# Altium PCB 0JCXG0_adapter_board.pcbdoc
Units mil, origin at the board's own origin, x right, y up, seen from the top; angles counter-clockwise.
Board outline 3937.05 x 985.09 mil, 2 copper layers (Top Layer, Bottom Layer); 11 components, 16 nets, 42 pads, 18 vias.
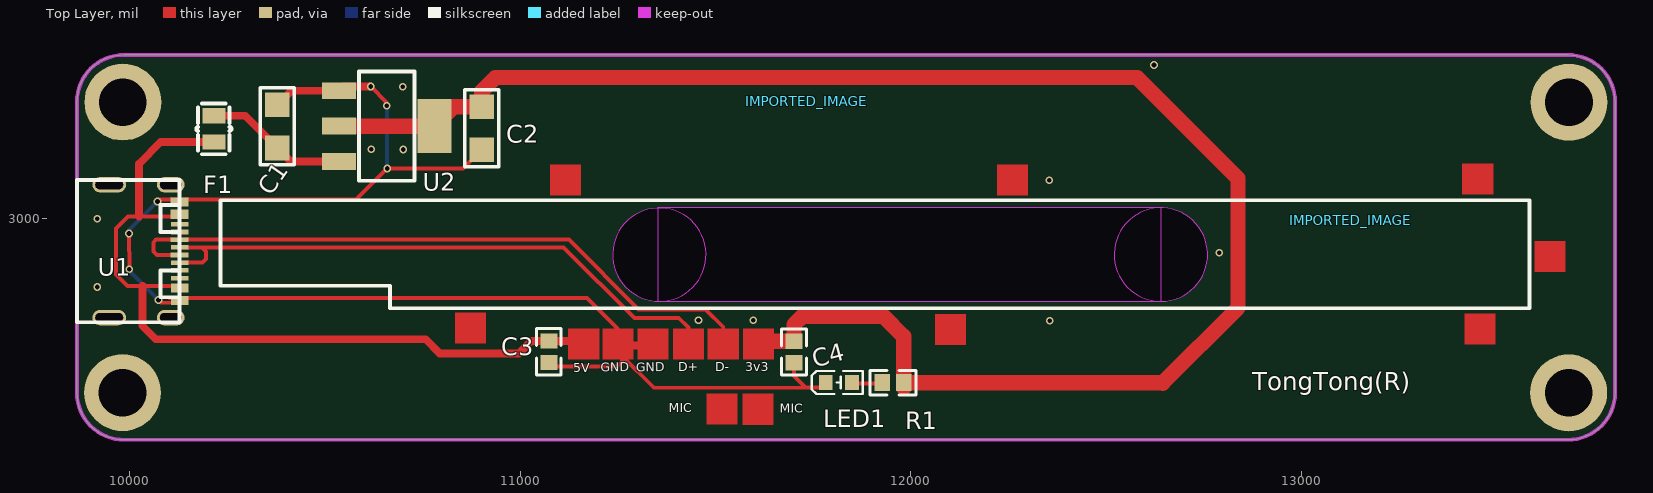
[diagram p0: Top Layer view]
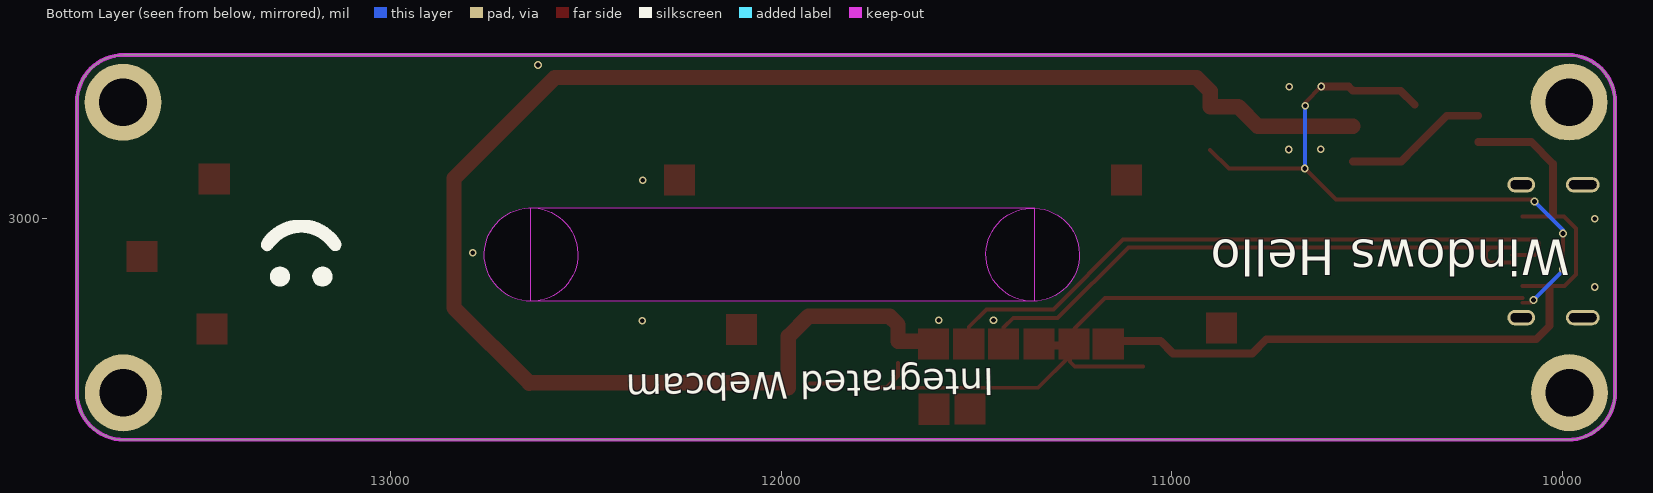
[diagram p1: Bottom Layer view, seen from below]

## Layer stack, top to bottom
Top Solder: solder mask 0.4, Solder Resist, Dk 3.5
Top Layer: signal copper 1.4
Dielectric1: dielectric 12.6, FR-4, Dk 4.8
Bottom Layer: signal copper 1.4
Bottom Solder: solder mask 0.4, Solder Resist, Dk 3.5

## Board outline
9865.73,2553.61 9865.73,3297.64 cw(c9986.23,3297.64) 9986.23,3418.14 9986.23,3418.11 13682.26,3418.11 cw(c13682.26,3297.61) 13802.75,3297.62 13802.73,3297.61 13802.73,2553.55 cw(c13682.23,2553.55) 13682.24,2433.05 13682.23,2433.11 9986.23,2433.11 9986.2,2433.07 cw(c9986.2,2553.57)
cut-out: 9986.23,3418.11
cut-out: 11356.67,2787.13 ccw(c11356.62,2906.7) 11356.57,2787.13 11356.67,2787.13
cut-out: 11351.95,3026.38 11351.95,2787.01 12641.32,2787.01 12641.32,3026.38
cut-out: 12640.33,2787.53 ccw(c12640.27,2907.1) 12640.22,2787.53 12640.33,2787.53

## Design rules (kind name [scope] priority, off if disabled: settings)
Clearance [All] p1: gap=10 ignorepadtopadclearanceinfootprint=FALSE except(0: Arc-Hole Track-Hole SMDPad-Hole THPad-Hole Via-Hole Fill-Hole Poly-Hole Region-Hole Text-Hole)
PolygonConnect [All] p1: connectstyle=Relief reliefconductorwidth=10 reliefentries=4 polygonreliefangle="90 Angle" airgapwidth=10
RoutingVias [All] p1: holewidth=28 width=50 viastyle="Through Hole" minholewidth=28 minwidth=50 maxholewidth=28 maxwidth=50
SolderMaskExpansion [All] p1: expansion=4
Width [All] p1: maxlimit=10 minlimit=10 preferedwidth=10
30 further rules are at their usual default settings.

## Components (designator, comment, footprint, x,y, rotation, side; value= is the part's Value field where it differs from the comment)
C1 "47uf" C1206#1 10378.72,3290.16 r270 top
C2 "47uf" C1206#2 10902.34,3175.2 r90 top
C3 "47uf" 0603 11073.6,2658.27 r270 top
C4 "47uf" 0603 11701.16,2657.48 r270 top
F1 "JK-SMD0805-050" FUSE_0805 10216.12,3228.74 r90 top
IMPORTED_IMAGE "Comment" IMPORTED_IMAGE 13126.35,2995.26 r0 top
IMPORTED_IMAGE "Comment" IMPORTED_IMAGE 11733.44,3299.19 r0 top
LED1 "LED0603-FD" LED0603-FD 11815.73,2579.53 r180 top
R1 "1K" 0603 11954.31,2579.14 r180 top
U1 "USB-TYPE-S-C8.64X7.25" USB-TYPE-S-C8.64X7.25 9948.41,2745.67 r0 top
U2 "SOT-223_L6.7-W3.5-P2.30-BR" SOT-223_L6.7-W3.5-P2.30-BR 10658.64,3235.83 r180 top

## Footprints (in the part's own frame and the unit in brackets; to place one, negate y for a bottom-side part, rotate by r counter-clockwise, add the part's x,y. Pads: shape width x height; smd on the part's side, far side on the other; paste and mask are expansions set on the pad)
0603 [mm]
  rect 1x1.1 smd: 1(-0.7,0) 2(0.7,0)
  silkscreen extent -1.5,-0.8 1.5,0.8
C1206#1 [mil]
  rect 63.01x63 smd: 1(0,0.01)
  rect 63x63 smd: 2(110.2,0.01)
  silkscreen extent -43,-43 154,43
C1206#2 [mil]
  rect 63x63 smd: 1(0,0.01) 2(110.2,0.01)
  silkscreen extent -43,-43 154,43
FUSE_0805 [mm]
  rect 1x1.5 smd: 1(-0.85,0) 2(0.85,0)
  silkscreen extent -1.65,-1.14 1.65,1.14
IMPORTED_IMAGE [mil]
LED0603-FD [mil]
  rect 35.44x39.38 smd: 1(-33.48,-0.06)
  rect 35.43x39.38 smd: 2(33.45,-0.06)
  silkscreen extent -61,-30 69,30
SOT-223_L6.7-W3.5-P2.30-BR [mm]
  rect 2.2x1.1 smd: 1(3.099,-2.3) 2(3.099,0) 3(3.099,2.3)
  rect 2.2x3.5 smd: 4(-3.099,0)
  silkscreen extent -1.8,-3.55 1.8,3.55
USB-TYPE-S-C8.64X7.25 [mm]
  oval 2.199x1 hole 0.6 slot 1.8 at 0 deg: 0(0,0)
  oval 2.199x1 hole 0.6 slot 1.8 at 0 deg copper offset 0,0: 0(0,8.64)
  oval 1.799x1 hole 0.6 slot 1.4 at 0 deg: 0(4,0)
  oval 1.799x1 hole 0.6 slot 1.4 at 0 deg copper offset 0,0: 0(4,8.64)
  rect 1.151x0.3 smd: A1(4.575,7.67) A4(4.575,6.87) B7(4.575,5.069) B9(4.575,6.57) B12(4.575,7.371)
  rect 1.148x0.3 smd: A5(4.576,5.57) A6(4.576,4.569) A8(4.576,3.07) A9(4.576,1.77) A12(4.576,0.97) B1(4.576,1.269) B4(4.576,2.07) B5(4.576,2.57) B6(4.576,3.571) B8(4.576,6.07)
  rect 1.151x0.302 smd: A7(4.575,4.07)
  silkscreen extent -2.1,-0.3 4.58,8.94

## Free pads (board coordinates)
  round 196.85 hole 122.05: 33(9982.65,2553.56) 33(9983.43,3297.27) 33(13683.82,2553.17) 33(13684.61,3296.88)

## Via types
v1: diameter 19.69, hole 12.01, Top Layer to Bottom Layer, 18 vias

## Nets (pads, with @x,y where several pads share a name; then routed paths per layer and width w, separated by ;. In a path a pad name is that pad's centre, name@x,y a point inside that pad or via, vN(x,y) a via of type N, cw(c..) or ccw(c..) an arc to the next point about the centre after c; other vN are vias at no path point)
0: 
3V3: C2.2 C4.1 R1.1 U2.2 U2.4 | length 4334.6
  Top Layer w39.37: U2.2 U2.4 10830.21,3285.4 C2.2 10902.33,3325.61 10936.93,3360.21 12553.93,3360.21 12579.23,3360.21 12837.43,3102.01 12837.43,2770.51 12644.83,2577.91 12643.73,2579.11 R1.1@11981.83,2579.11 ; 11606.67,2696.06 11617.69,2685.05 C4.1 ; C4.1@11701.13,2685.01 11701.13,2727.91 11722.43,2749.21 11930.33,2749.21 11981.83,2697.71 R1.1@11981.83,2566.11
5V: C1.2 C3.1 F1.1 F1.2 U1.A4 U1.A9 U1.B4 U1.B9 U2.3 | length 2412.1
  Top Layer w10: 10102.93,3004.31 9996.43,3004.31 9966.13,2974.01 9966.13,2856.31 9995.23,2827.11 10103.03,2827.11
  Top Layer w19.68: 10024.83,3004.31 10024.83,3139.81 10080.33,3195.31 F1.1 ; 10033.43,2827.11 10033.43,2724.51 10067.33,2690.51 10758.63,2690.51 ; F1.2 10296.48,3262.2 C1.2 10413.41,3145.27 U2.3 ; 10758.63,2690.11 10794.83,2653.91 10997.23,2653.91 11029.13,2685.81 C3.1 ; C3.1 11156.29,2685.84 11162.97,2692.52
DATA+: U1.A6 U1.B6 | length 1560.7
  Top Layer w10: U1.B6@10127.93,2886.3 10186.76,2886.3 10195.79,2895.32 10195.79,2915.01 10185.21,2925.59 U1.A6@10127.93,2925.59 ; 10160.33,2925.51 11111.43,2925.51 11292.53,2744.51 11406.23,2744.51 11430.73,2720.11 11430.73,2678.31
DATA-: U1.A7 U1.B7 | length 1715
  Top Layer w10: 10102.93,2945.21 11125.23,2945.21 11303.53,2766.91 11474.83,2766.91 11520.03,2721.61 11520.03,2678.31 ; U1.A7@10127.86,2905.99 10070.96,2905.99 10061.96,2914.99 10061.96,2938.59 10068.56,2945.29 U1.B7@10127.86,2945.29
GND: C1.1 C2.1 C3.2 C4.2 LED1.2 U1.A1 U1.A12 U1.B1 U1.B12 U2.1 | length 3906.8
  Top Layer w10: v1(9999.19,2961.02) v1(9999.98,2869.69) ; v1(10072.03,3042.91) 10076.77,3047.65 10102.94,3047.65 10580.3,3047.65 v1(10659.82,3127.17) 10854.31,3127.17 C2.1 ; v1(10074.39,2790.55) 10081.09,2783.85 10102.99,2783.85 ; 10103.03,2795.61 11170.83,2795.61 11249.23,2717.31 11249.23,2694.11 11250.73,2692.51 ; v1(10618.09,3337.01) 10658.64,3296.46 v1(10658.64,3287.8) ; C3.2@11073.6,2620.08 11248.81,2620.08 11261.4,2632.67 11261.4,2671.25 11250.77,2681.88 ; 11261.4,2647.64 11342.79,2566.25 11751.55,2566.25 ; C4.2 11701.16,2596.06 11730.69,2566.53 LED1.2@11782.26,2566.53
  Top Layer w19.68: C1.1 10414.94,3326.38 U2.1 10547.27,3337.01 v1(10618.09,3337.01) ; 11250.96,2674.41 11340.33,2674.41
  Bottom Layer w10: v1(9999.19,2961.02) 9999.19,2970.07 v1(10072.03,3042.91) ; v1(9999.98,2869.69) 9999.98,2864.96 v1(10074.39,2790.55) ; v1(10658.64,3287.8) 10659.82,3286.62 v1(10659.82,3127.17)
  other v1: 12355.49,2737.8 11456.67,2738.98 11596.83,2738.98 9917.69,2824.02 12789.74,2911.42 9917.69,2998.82 12354.31,3097.64 10619.27,3176.38 10701.16,3175.99 10699.98,3336.62 12622.42,3392.13
MIC: 
S$67: 
S$69: 
S$179: 
S$181: 
S$185: 
S$225: 
S$230: 
S$24065: 
S$85385: LED1.1 R1.2 | length 77.7
  Top Layer w10: LED1.1@11848.8,2577.56 11925.98,2577.56 R1.2@11926.36,2577.17
pads on no net: U1.0 U1.A5 U1.A8 U1.B5 U1.B8

## Polygon pours and split planes (outlines as drawn)
no net on Bottom Solder (none): 9865.73,2553.61 9865.73,3297.64 cw(c9986.23,3297.64) 9986.23,3418.14 9986.23,3418.11 13682.26,3418.11 cw(c13682.26,3297.61) 13802.75,3297.62 13802.73,3297.61 13802.73,2553.55 cw(c13682.23,2553.55) 13682.24,2433.05 13682.23,2433.11 9986.23,2433.11 9986.2,2433.07 cw(c9986.2,2553.57)

## Keep-outs
Keep-Out Layer:
  lines w10: 9865.71,2553.57 ccw(c9986.2,2553.57) 9986.2,2433.07 ; 9865.73,3297.64 cw(c9986.23,3297.64) 9986.23,3418.14 ; 13682.24,2433.05 ccw(c13682.23,2553.55) 13802.73,2553.55 ; 13682.26,3418.11 cw(c13682.26,3297.61) 13802.75,3297.62

## Other copper
Top Layer:
  region net 0: 11077.34,3137.2 11077.34,3058.85 11155.69,3058.85 11155.69,3137.2
  region net 0: 10834.04,2758.06 10834.04,2679.72 10912.38,2679.72 10912.38,2758.06
  region net 0: 13411.98,3139.17 13411.98,3060.82 13490.33,3060.82 13490.33,3139.17
  region net 0: 13597.41,2941.14 13597.41,2862.79 13675.76,2862.79 13675.76,2941.14
  region net 0: 13417.89,2755.7 13417.89,2677.36 13496.24,2677.36 13496.24,2755.7
  region net 0: 12221.43,3137.2 12221.43,3058.86 12299.78,3058.86 12299.78,3137.2
  region net 0: 12062.77,2754.53 12062.77,2676.18 12141.12,2676.18 12141.12,2754.53
  region net 5V: 11123.79,2717.52 11123.79,2639.17 11202.14,2639.17 11202.14,2717.52
  region net GND: 11300.95,2717.52 11300.95,2639.17 11379.3,2639.17 11379.3,2717.52
  region net DATA+: 11391.5,2717.52 11391.5,2639.17 11469.85,2639.17 11469.85,2717.52
  region net DATA-: 11480.88,2717.52 11480.88,2639.17 11559.22,2639.17 11559.22,2717.52
  region net 3V3: 11571.03,2717.52 11571.03,2639.17 11649.38,2639.17 11649.38,2717.52
  region net MIC: 11478.12,2550.58 11478.12,2472.24 11556.47,2472.24 11556.47,2550.58
  region net MIC: 11570.24,2550.19 11570.24,2471.85 11648.59,2471.85 11648.59,2550.19
  region net GND: 11211.59,2717.52 11211.59,2639.17 11289.93,2639.17 11289.93,2717.52

## Silkscreen, mask and mechanical layers (free items; w line width, h text height)
Top Overlay:
  lines w10: 10233.09,2827.29 10666.59,2827.29 10666.59,2769.59 13583.09,2769.59 ; 10233.15,3046.06 13583.14,3046.06 13583.13,2769.65 ; 10233.19,2827.29 10233.19,3046.09
  text "3v3" at 11575.96,2601.19 h39.37
  text "GND" at 11298.01,2599.61 h39.37 r1
  text "D+" at 11404.7,2600.4 h39.37
  text "D-" at 11499.98,2600.4 h39.37
  text "GND" at 11205.89,2599.22 h39.37 r1
  text "5V" at 11135.81,2598.43 h39.37
  text "TongTong(R)" at 12873.6,2544.49 h78.74
  text "MIC" at 11380.29,2495.67 h39.37
  text "MIC" at 11664.94,2494.1 h39.37
  text "给0JCXG0搭配的外围电路，既是一个外壳，又能搭配降压电路来使用0JCXG0摄像头，USB-C使用的是USB2.0，立创料号C309365，U2的降压模块是AMS1117-3.3，C1，C2，C3，C4绿波电龙可以不焊，LED和R1电阻也可以不焊，F1自恢复保险丝使用1A左右即可，如果没有自恢复保险丝也可以不焊，但是要一坨锡把F1的两个焊盘连在一起，外围4个支撑铜柱推荐买M2.5*5*5，或者M3*4.6*4.5左右，还得取搭配M2.5或M3螺丝一定不要太长，https://detail.tmall.com/item.htm?id=19381221986&spm=a1z09.2.0.0.221d2e8diBZM9r&_u=r110vlodc86a&skuId=3691585453422" at 1500,1500 h80
Bottom Overlay:
  text "Windows Hello" at 9981.87,2975.59 h157.48 r180
  text "Integrated Webcam" at 11456.67,2638.58 h118.11 r179
Top Paste:
  region: 11077.34,3137.2 11077.34,3058.85 11155.69,3058.85 11155.69,3137.2
  region: 10834.04,2758.06 10834.04,2679.72 10912.38,2679.72 10912.38,2758.06
  region: 13411.98,3139.17 13411.98,3060.82 13490.33,3060.82 13490.33,3139.17
  region: 13597.41,2941.14 13597.41,2862.79 13675.76,2862.79 13675.76,2941.14
  region: 13417.89,2755.7 13417.89,2677.36 13496.24,2677.36 13496.24,2755.7
  region: 12221.43,3137.2 12221.43,3058.86 12299.78,3058.86 12299.78,3137.2
  region: 12062.77,2754.53 12062.77,2676.18 12141.12,2676.18 12141.12,2754.53
  region: 11123.79,2717.52 11123.79,2639.17 11202.14,2639.17 11202.14,2717.52
  region: 11300.95,2717.52 11300.95,2639.17 11379.3,2639.17 11379.3,2717.52
  region: 11391.5,2717.52 11391.5,2639.17 11469.85,2639.17 11469.85,2717.52
  region: 11480.88,2717.52 11480.88,2639.17 11559.22,2639.17 11559.22,2717.52
  region: 11571.03,2717.52 11571.03,2639.17 11649.38,2639.17 11649.38,2717.52
  region: 11478.12,2550.58 11478.12,2472.24 11556.47,2472.24 11556.47,2550.58
  region: 11570.24,2550.19 11570.24,2471.85 11648.59,2471.85 11648.59,2550.19
  region: 11211.59,2717.52 11211.59,2639.17 11289.93,2639.17 11289.93,2717.52
Top Solder:
  rectangle: 11703.52,3156.3 12351.94,3320.87
  region: 11077.34,3137.2 11077.34,3058.85 11155.69,3058.85 11155.69,3137.2
  region: 10834.04,2758.06 10834.04,2679.72 10912.38,2679.72 10912.38,2758.06
  region: 13411.98,3139.17 13411.98,3060.82 13490.33,3060.82 13490.33,3139.17
  region: 13597.41,2941.14 13597.41,2862.79 13675.76,2862.79 13675.76,2941.14
  region: 13417.89,2755.7 13417.89,2677.36 13496.24,2677.36 13496.24,2755.7
  region: 12221.43,3137.2 12221.43,3058.86 12299.78,3058.86 12299.78,3137.2
  region: 12062.77,2754.53 12062.77,2676.18 12141.12,2676.18 12141.12,2754.53
  region: 11123.79,2717.52 11123.79,2639.17 11202.14,2639.17 11202.14,2717.52
  region: 11300.95,2717.52 11300.95,2639.17 11379.3,2639.17 11379.3,2717.52
  region: 11391.5,2717.52 11391.5,2639.17 11469.85,2639.17 11469.85,2717.52
  region: 11480.88,2717.52 11480.88,2639.17 11559.22,2639.17 11559.22,2717.52
  region: 11571.03,2717.52 11571.03,2639.17 11649.38,2639.17 11649.38,2717.52
  region: 11478.12,2550.58 11478.12,2472.24 11556.47,2472.24 11556.47,2550.58
  region: 11570.24,2550.19 11570.24,2471.85 11648.59,2471.85 11648.59,2550.19
  region: 11211.59,2717.52 11211.59,2639.17 11289.93,2639.17 11289.93,2717.52
Document:
  lines w0.1: 8459,2700.97 8461,2702.97